# Altium PCB B2C_V1.0-V5.0.PcbDoc
Units mm, origin at the board's own origin, x right, y up, seen from the top; angles counter-clockwise.
Board outline 66.13 x 30.13 mm, 2 copper layers (Top Layer, Bottom Layer); 31 components, 27 nets, 114 pads, 13 vias.
Unrouted connection lines stored in the file: 2.
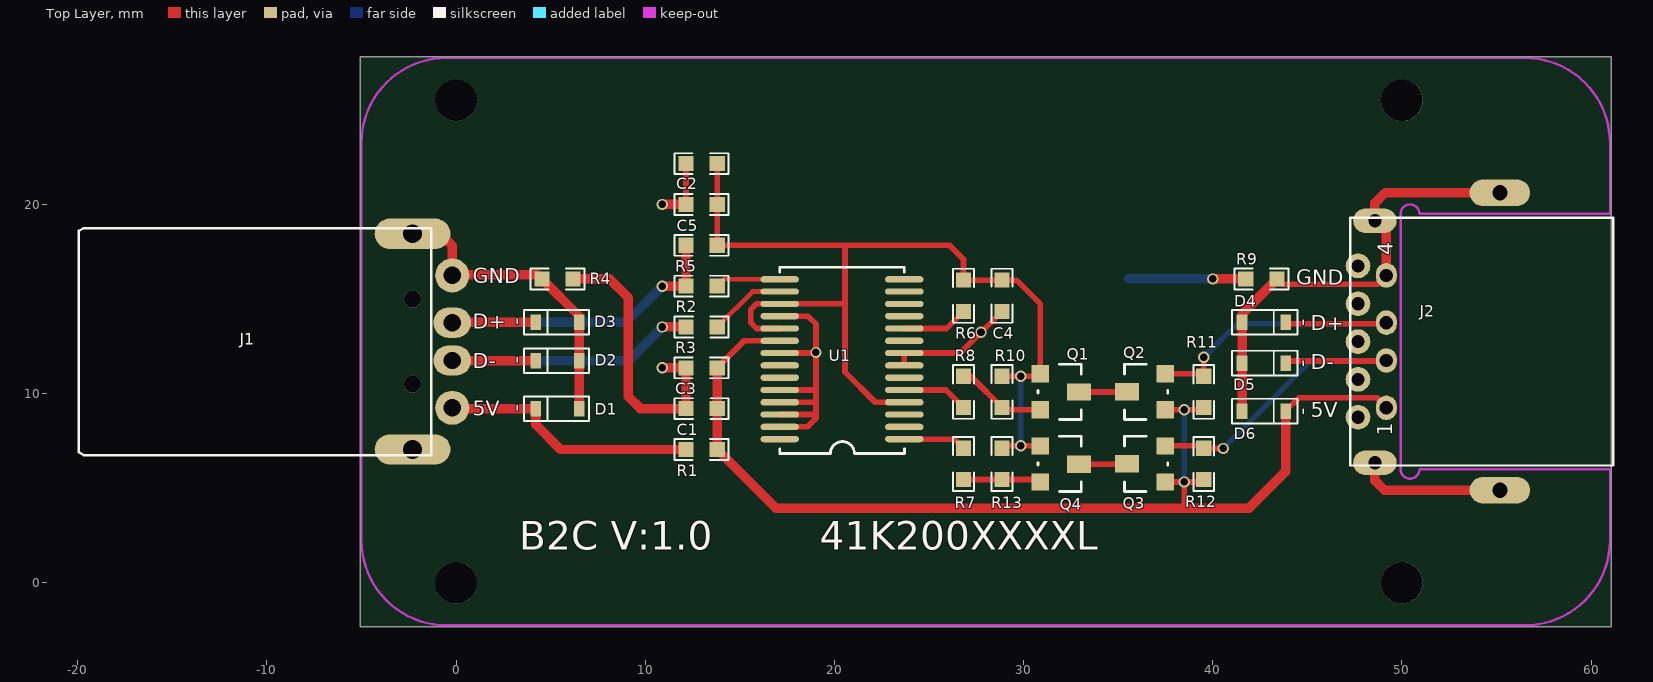
[diagram p0: Top Layer view]
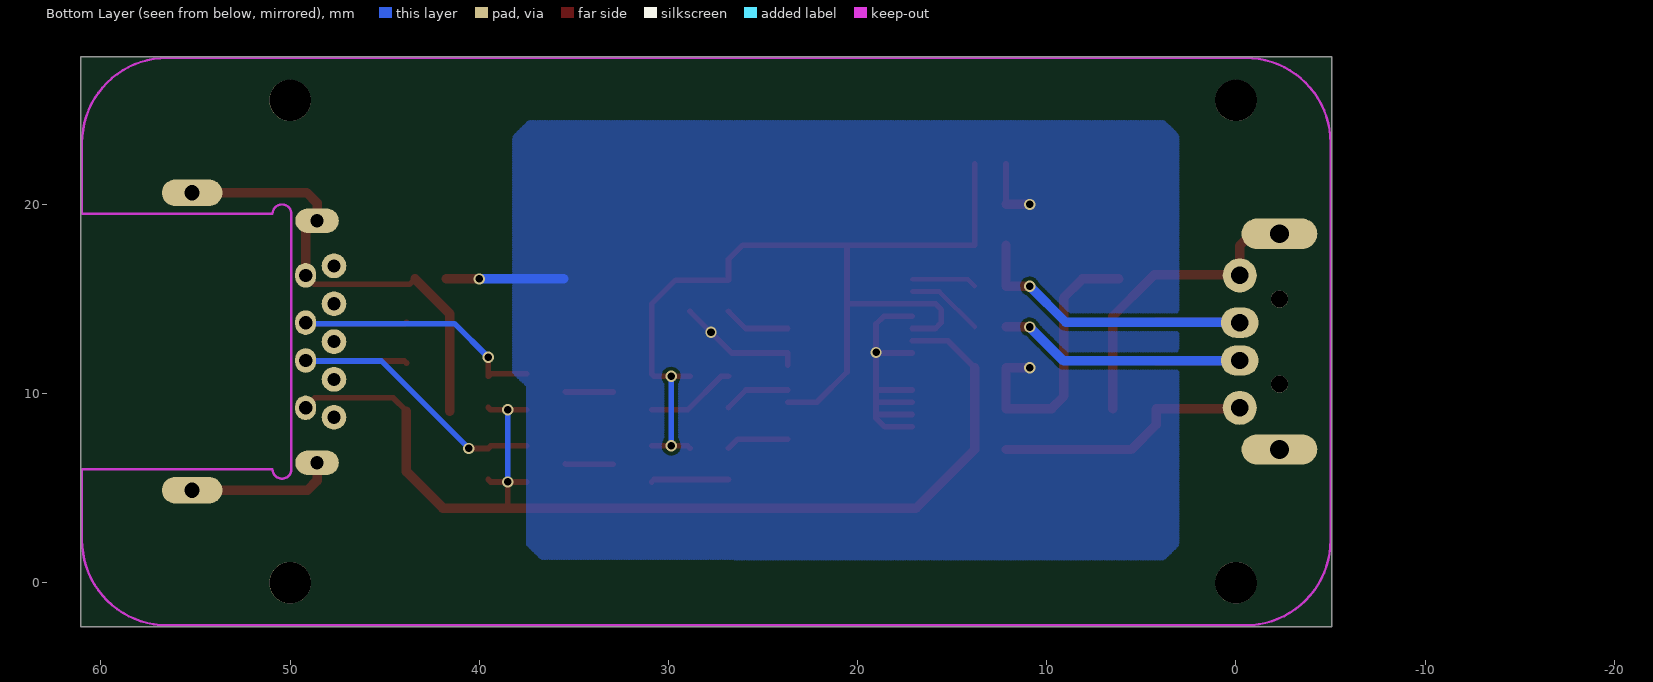
[diagram p1: Bottom Layer view, seen from below]

## Layer stack, top to bottom
Top Layer: signal copper 0.0356
Dielectric: core 0.32, FR-4, Dk 4.8
Bottom Layer: signal copper 0.0356

## Board outline
-5.063,-2.314 61.064,-2.314 61.064,27.814 -5.063,27.814

## Design rules (kind name [scope] priority, off if disabled: settings)
Clearance Clearance_1 [InNetClass('All Nets') vs InNetClass('All Nets')] p1: gap=0.203
Clearance keep [All] p2 off: gap=0.5
ComponentClearance [All] p1 off: gap=0.254 collisioncheckmode=3 verticalgap=0.254 showdistances=FALSE
HoleSize [All] p1: absolutevalues=TRUE maxlimit=3.2 minlimit=0.025 maxpercent=80.000 minpercent=20.000
PolygonConnect GND [InNet('GND_1')] p1: connectstyle=Relief reliefconductorwidth=0.508 reliefentries=4 polygonreliefangle="90 Angle"
PolygonConnect [InNet('NetQ56_2')] p2: connectstyle=Direct reliefconductorwidth=0.254 reliefentries=4 polygonreliefangle="90 Angle"
RoutingLayers [All] p1: top layer_v5=FALSE bottom layer_v5=FALSE
RoutingVias [All] p1: holewidth=0.4 width=0.6 viastyle="Through Hole" minholewidth=0.3 minwidth=0.4 maxholewidth=0.8 maxwidth=1.27
SilkscreenOverComponentPads [All] p1: minsilkscreentomaskgap=0.254
SolderMaskExpansion [All] p1: expansion=0.102
Width [All] p1: maxlimit=10 minlimit=0.203 preferedwidth=0.5
24 further rules are at their usual default settings.

## Components (designator, comment, footprint, x,y, rotation, side; value= is the part's Value field where it differs from the comment)
C1 "10UF" 0603 12.983,9.204 r180 top
C2 "0.1UF" 0603 12.983,22.158 r0 top
C3 "0.1UF" 0603 12.983,11.363 r0 top
C4 "0.1UF" 0603 28.858,15.173 r270 top
C5 "10UF" 0603 12.983,19.999 r0 top
D1 "ZD5.6V" SOD-323-BZT52 5.363,9.204 r90 top
D2 "ZD5.6V" SOD-323-BZT52 5.363,11.744 r90 top
D3 "ZD5.6V" SOD-323-BZT52 5.363,13.776 r90 top
D4 "ZD5.6V" SOD-323-BZT52 42.701,13.776 r270 top
D5 "ZD5.6V" SOD-323-BZT52 42.701,11.617 r270 top
D6 "ZD5.6V" SOD-323-BZT52 42.701,9.077 r270 top
J1 "USB_A" USB_NTD -1.25,12.75 r0 top
J2 "USB_B" USB_A_TYPE_1 49.18,16.25 r90 top locked
Q1 "2N7002K" SOT-23 31.906,10.093 r270 top
Q2 "2N7002K" SOT-23 36.478,10.093 r90 top
Q3 "2N7002K" SOT-23 36.478,6.283 r90 top
Q4 "2N7002K" SOT-23 31.906,6.283 r270 top
R1 "BEAD" 0603 12.983,7.045 r0 top
R2 "22R" 0603 12.983,15.681 r0 top
R3 "22R" 0603 12.983,13.522 r180 top
R4 "BEAD" 0603 5.363,16.062 r0 top
R5 "1.5K" 0603 12.983,17.84 r0 top
R6 "4.7K" 0603 26.826,15.173 r90 top
R7 "BEAD" 0603 26.826,6.283 r270 top
R8 "BEAD" 0603 26.826,10.093 r90 top
R9 "BEAD" 0603 42.574,16.062 r0 top
R10 "4.7K" 0603 28.858,10.093 r270 top
R11 "4.7K" 0603 39.526,10.093 r90 top
R12 "4.7K" 0603 39.526,6.283 r90 top
R13 "4.7K" 0603 28.858,6.283 r270 top
U1 "PL2303HXD-SSOP28" SSOP-28 26.112,18.33 r180 top

## Footprints (in the part's own frame and the unit in brackets; to place one, negate y for a bottom-side part, rotate by r counter-clockwise, add the part's x,y. Pads: shape width x height; smd on the part's side, far side on the other; paste and mask are expansions set on the pad)
0603 [mm]
  rect 0.8x0.8 smd: 1(-0.825,0) 2(0.825,0)
  silkscreen extent -1.42,-0.55 1.43,0.55
SOD-323-BZT52 [mm]
  rect 0.82x0.56 smd: 1(0,1.15) 2(0,-1.15)
  silkscreen extent -0.65,-1.67 0.65,1.78
SOT-23 [mil]
  rect 36x36 smd: 1(-37.5,-40) 2(37.5,-40)
  rect 36x50 smd: 3(0.5,40)
  silkscreen extent -58,-45 58,45
SSOP-28 [mil]
  round 19.68 on Top Overlay: 0(29.23,423.03)
  oval 80x13 smd: 1(95.02,422.74) 2(95.02,397.15) 3(95.02,371.56) 4(95.02,345.96) 5(95.02,320.37) 6(95.02,294.78) 7(95.02,269.19) 8(95.02,243.6) 9(95.02,218.01) 10(95.02,192.42) 11(95.02,166.83) 12(95.02,141.24) 13(95.02,115.65) 14(95.02,90.06) 15(354.39,90.06) 16(354.39,115.65) 17(354.39,141.24) 18(354.39,166.83) 19(354.39,192.42) 20(354.39,218.01) 21(354.39,243.6) 22(354.39,269.19) 23(354.39,294.78) 24(354.39,320.37) 25(354.39,345.96) 26(354.39,371.56) 27(354.39,397.15) 28(354.39,422.74)
  silkscreen extent 95,65 354,453
USB_A_TYPE_1 [mm]
  oval 1.4x3.2 hole 0.8: 0(-11.356,-5.999) 0(4.366,-5.999)
  oval 1.3x2.3 hole 0.7: 0(-9.909,0.605) 0(2.893,0.605)
  oval 1.3x1.1 hole 0.7: 1(-7,0) 2(-4.5,0) 3(-2.5,0) 4(0,0)
  round 1.3 hole 0.7: 5(0.5,1.5) 6(-1.5,1.5) 7(-3.5,1.5) 8(-5.5,1.5) 9(-7.5,1.5)
USB_NTD [mm]
  round 0.9 hole 0.9: 0(-1.05,2.25) 0(-1.05,-2.25)
  oval 4x1.6 hole 1: 0(-1.048,-5.7) 0(-1.048,5.7)
  round 1.8 hole 0.92: 1(1.05,-3.5) 4(1.05,3.5)
  oval 2x1.6 hole 0.92: 2(1.05,-1) 3(1.05,1)
  silkscreen extent -18.7,-6 -0.05,6

## Free pads (board coordinates)
  round 2.2 hole 2.2 unplated: 0(0,0) 0(0,25.5) 0(50,0) 0(50,25.5)

## Via types
v1: diameter 0.6, hole 0.4, Top Layer to Bottom Layer, tented both sides, 13 vias

## Nets (pads, with @x,y where several pads share a name; then routed paths per layer and width w, separated by ;. In a path a pad name is that pad's centre, name@x,y a point inside that pad or via, vN(x,y) a via of type N, cw(c..) or ccw(c..) an arc to the next point about the centre after c; other vN are vias at no path point)
GND: C1.2 C2.1 C3.1 C4.2 C5.1 R4.2 R9.1 U1.7 U1.8 U1.18 U1.21 U1.24 U1.25 U1.26 U1.27 | length 51.6
  Top Layer w0.3: C5.1 C2.1 ; U1.27 18.569,8.243 19.027,8.7 19.027,10.225 ; U1.26 18.969,8.893 ; U1.25 18.944,9.543 ; U1.24 18.994,10.193 19.027,10.225 ; U1.21 v1@19.019,12.143 ; U1.18 18.609,14.093 19.027,13.675 19.027,10.225 ; U1.7 U1.8 ; 25.448,12.143 U1.8 ; C4.2 26.652,12.143 U1.8
  Top Layer w0.5: R4.2 8.115,16.062 9.102,15.075 9.102,9.85 9.748,9.204 C1.2 ; 10.598,9.204 C1.2 ; v1(10.902,11.363) C3.1 C1.2 ; v1(10.902,19.999) C5.1 ; v1(39.999,16.062) R9.1
  Bottom Layer w0.5: 35.539,16.062 v1(39.999,16.062)
  other v1: 19.027,12.175 27.752,13.243
NetC1_2: 
NetD1_1: D1.1 J1.1 R1.1 | length 13.7
  Top Layer w0.5: J1.1@-0.169,9.204 D1.1 4.213,8.364 5.532,7.045 R1.1
NetD1_2: D1.2 D2.2 D3.2 J1.0@-2.298,7.05 J1.0@-2.298,18.45 J1.4 R4.1 | length 16.4
  Top Layer w0.5: J1.0@-2.298,18.45 -0.825,18.45 -0.198,17.823 -0.198,16.275 4.325,16.275 R4.1 6.513,14.087 D3.2 D2.2 D1.2
NetD2_1: D2.1 J1.2 R3.2 | length 17.4
  Top Layer w0.5: J1.2@-0.167,11.744 D2.1 ; v1(10.908,13.522) R3.2
  Bottom Layer w0.5: J1.2@-0.148,11.725 9.111,11.725 v1(10.908,13.522)
NetD3_1: D3.1 J1.3 R2.1 R5.1 | length 19.7
  Top Layer w0.5: J1.3@-0.197,13.776 D3.1 ; v1(10.908,15.681) R2.1 R5.1
  Bottom Layer w0.5: J1.3@-0.198,13.775 9.002,13.775 v1(10.908,15.681)
NetD4_1: D4.1 J2.3 Q2.2 R11.2 | length 18.9
  Top Layer w0.3: Q2.2 39.398,11.046 R11.2 v1(39.526,11.918) ; D4.1 43.927,13.7 J2.3@49.202,13.7
  Bottom Layer w0.3: v1(39.526,11.918) 41.308,13.7 J2.3@49.202,13.7
NetD4_2: D4.2 D5.2 D6.2 J2.0 J2.4 R9.2 | length 32.5
  Top Layer w0.3: R9.2 43.686,15.775 48.727,15.775 J2.4@49.177,16.225
  Top Layer w0.5: D6.2 D5.2 D4.2 41.551,14.214 R9.2 ; J2.0@48.575,6.341 48.575,5.4 49.081,4.894 J2.0@55.179,4.894 ; J2.4 49.18,18.538 48.575,19.143 48.575,20.075 49.116,20.616 J2.0@55.179,20.616
NetD5_1: D5.1 J2.2 Q3.2 R12.2 | length 19
  Top Layer w0.3: Q3.2 39.398,7.236 R12.2 ; R12.2@39.534,7.1 v1(40.552,7.1) ; D5.1 43.959,11.725 J2.2@49.177,11.725
  Bottom Layer w0.3: v1(40.552,7.1) 45.177,11.725 J2.2@49.177,11.725
NetJ2_1: 
NetJ2_2: 
NetJ2_3: 
NetJ2_4: 
NetQ1_2: Q1.2 R8.2 R10.2 | length 4.8
  Top Layer w0.3: R8.2 27.208,10.918 28.985,9.141 Q1.2
NetQ1_3: Q1.3 Q2.3 | length 2.6
  Top Layer w0.3: Q1.3 35.436,10.081 Q2.3
NetQ3_3: Q3.3 Q4.3 | length 2.6
  Top Layer w0.3: Q4.3 35.436,6.271 Q3.3
NetQ4_2: Q4.2 R7.2 R13.2 | length 4.1
  Top Layer w0.3: R7.2 R13.2 30.762,5.458 Q4.2
NetR1_1: 
NetR2_1: 
NetR2_2: R2.2 U1.15 | length 3.5
  Top Layer w0.254: R2.2 14.169,16.043 U1.15
NetR3_1: R3.1 U1.16 | length 4.1
  Top Layer w0.254: R3.1 15.678,15.393 U1.16
NetR3_2: 
NetR6_1: R6.1 U1.10 | length 3.5
  Top Layer w0.3: U1.10 25.92,13.443 R6.1
NetR7_1: R7.1 U1.1 | length 3.3
  Top Layer w0.3: U1.1 26.341,7.593 R7.1
NetR8_1: R8.1 U1.5 | length 3.5
  Top Layer w0.3: U1.5 25.901,10.193 R8.1
USB5V: C1.1 C3.2 D6.1 J2.1 Q2.1 Q3.1 R1.2 R11.1 R12.1 U1.20 | length 58.7
  Top Layer w0.3: C3.2 15.237,12.793 U1.20 ; Q3.1 v1(38.502,5.331) ; Q2.1 v1(38.502,9.141) 39.398,9.141 R11.1 ; 38.502,3.975 v1(38.502,5.331) ; R12.1 39.398,5.331 v1(38.502,5.331) ; D6.1 44.549,9.775 48.702,9.775 J2.1@49.202,9.275
  Top Layer w0.5: C3.2 C1.1 R1.2 16.903,3.95 41.927,3.95 43.851,5.874 D6.1
  Bottom Layer w0.3: v1(38.502,5.331) v1(38.502,9.141)
VO_33: C2.2 C4.1 C5.2 Q1.1 Q4.1 R5.2 R6.2 R10.1 R13.1 U1.4 U1.17 U1.19 | length 53.5
  Top Layer w0.3: C2.2 C5.2 R5.2 20.562,17.84 ; U1.19 15.884,13.443 15.577,13.75 15.577,14.45 15.869,14.743 U1.17 20.504,14.743 ; 21.652,10.05 22.159,9.543 ; U1.4 22.159,9.543 ; R13.1 28.985,7.236 v1(29.852,7.236) Q4.1 ; R10.1 v1(29.858,10.918) 30.762,10.918 Q1.1 30.89,14.737 29.629,15.998 C4.1 R6.2 26.826,17.101 26.087,17.84 20.562,17.84 ; 20.562,17.84 20.562,11.14 22.159,9.543
  Bottom Layer w0.3: v1@29.858,7.242 v1(29.858,10.918)
pads on no net: J1.0@-2.3,10.5 J1.0@-2.3,15 J2.5 J2.6 J2.7 J2.8 J2.9 U1.0 U1.2 U1.3 U1.6 U1.9 U1.11 U1.12 U1.13 U1.14 U1.22 U1.23 U1.28

## Polygon pours and split planes (outlines as drawn)
GND on Bottom Layer "Bottom Layer-GND" (hatched 90Degree grid 0.127 track 0.203, remove dead copper, pour order 1000): 3.827,1.275 3.077,2.025 3.077,12.825 3.077,23.625 3.802,24.35 37.377,24.35 38.177,23.55 38.177,11.125 37.427,10.375 37.427,2.025 36.702,1.3

## Keep-outs
Keep-Out Layer:
  lines w0.127: -5,2.25 ccw(c-0.5,2.25) -0.5,-2.25 56.5,-2.25 ccw(c56.5,2.25) 61,2.25 61,6 50.93,6 cw(c50.43,6) 49.93,6 49.93,19.5 cw(c50.43,19.5) 50.93,19.5 61,19.5 61,23.25 ccw(c56.5,23.25) 56.5,27.75 -0.5,27.75 ccw(c-0.5,23.25) -5,23.25 -5,2.25

## Other copper
Top Layer:
  text "TopLayer" at 34.457,-47.083 h2.29
Bottom Layer:
  text "BottomLayer" at 34.774,-47.158 h2.29

## Silkscreen, mask and mechanical layers (free items; w line width, h text height)
Top Overlay:
  lines w0.127: -1.3,6.75 -1.3,18.75 ; 47.28,6.2 47.28,19.3 61.18,19.3 61.18,6.2 47.28,6.2
  text "4" at 49.527,17.325 h0.8 r90
  text "GND" at 0.877,15.825 h0.8
  text "GND" at 44.427,15.75 h0.8
  text "D+" at 0.877,13.425 h0.8
  text "D+" at 45.177,13.35 h0.8
  text "D-" at 0.877,11.35 h0.8
  text "D-" at 45.177,11.275 h0.8
  text "5V" at 0.877,8.825 h0.8
  text "5V" at 45.177,8.75 h0.8
  text "1" at 49.502,7.775 h0.8 r90
  text "B2C V:1.0" at 3.352,1.75 h1.5
  text "41K200XXXXL" at 19.227,1.75 h1.5
  text "TopOverlay" at 33.949,-47.083 h2.29
  text "GTO" at 77.307,-47.429 h2.29
Bottom Overlay:
  text "BottomOverlay" at 34.774,-47.158 h2.29
  text "GBO" at 78.132,-47.504 h2.29
Top Paste:
  text "TopPaste" at 33.949,-47.083 h2.29
  text "GTP" at 77.307,-47.429 h2.29
Bottom Paste:
  text "BottomPaste" at 34.774,-47.158 h2.29
  text "GBP" at 78.132,-47.504 h2.29
Top Solder:
  text "TopSolder" at 33.949,-47.083 h2.29
  text "GTS" at 77.307,-47.429 h2.29
Bottom Solder:
  text "BottomSolder" at 34.774,-47.158 h2.29
  text "GBS" at 78.132,-47.504 h2.29
Drill Guide:
  text "DrillGuide" at 34.774,-47.158 h2.29
  text "DRL" at 78.132,-47.504 h2.29
Mechanical 1:
  drawing of 189 lines, arcs and shapes, not listed
  text "TITLE:" at 0.036,-27.089 h1.14
  text "ENGINEER:" at -22.507,-27.406 h1.14
  text "VIVI" at -12.775,-27.539 h0.6
  text "DYNAPACK" at 55.78,-28.708 h3.81
  text "PRIOR TO DATE:" at -22.554,-30.003 h1.14
  text "NTD" at 18.794,-31.724 h3.81
  text "ENGINEER:" at -22.507,-37.058 h1.14
  text "PART NO:" at 0.353,-39.154 h1.14
  text "REV:" at 44.486,-39.154 h1.14
  text "DATE:" at 56.233,-39.154 h1.14
  text "PRIOR TO DATE:" at -22.554,-39.604 h1.14
  text "1.0" at 48.931,-41.059 h2.29
  text "03/14/2014" at 61.948,-41.059 h2.29
  text "41K4DM200XXXXL" at 11.072,-41.313 h2.29
  text "FILE NAME:" at -22.507,-46.202 h1.14
  text "LAYER:" at 24.229,-46.202 h1.14
  text "GERBER:" at 70.457,-46.202 h1.14
  text "B2C" at -6.962,-47.925 h2.29
Mechanical 2:
  circle w0.127: c50,0 r2.25
  circle w0.127: c0,0 r2.25
  circle w0.127: c0,25.5 r2.25
  circle w0.127: c50,25.5 r2.25
  lines w0.127: -5,5.25 1.1,5.25 1.1,1.963 ; -5,20.25 1.1,20.25 1.1,23.537 ; 1.963,1.1 48.037,1.1 ; 1.963,24.4 48.037,24.4 ; 48.9,1.963 48.9,4.25 61,4.25 ; 48.9,23.537 48.9,21.25 61,21.25
Drill Drawing:
  text ".Legend" at -3.423,30.925 h2
  text "DrillDrawing" at 34.774,-47.158 h2.29
  text "DRR" at 78.132,-47.504 h2.29

## Text inside footprints (layer, text, board x,y; h text height)
D1: Top Overlay "-" at 2.95,9.433 h0.8 r270
D2: Top Overlay "-" at 2.95,11.973 h0.8 r270
D3: Top Overlay "-" at 2.95,14.005 h0.8 r270
D4: Top Overlay "-" at 45.113,13.548 h0.8 r90
D5: Top Overlay "-" at 45.113,11.389 h0.8 r90
D6: Top Overlay "-" at 45.113,8.849 h0.8 r90
J1: Drill Drawing "1X2.5mm" at -12.923,18.175 h0.8; Drill Drawing "1X2.5mm" at -12.898,6.775 h0.8
J2: Drill Drawing "0.8X2.6mm" at 60.488,19.473 h0.8 r90; Drill Drawing "0.8X2.6mm" at 60.488,3.751 h0.8 r90; Drill Drawing "0.7X1.8mm" at 53.173,16.628 h0.8 r90; Drill Drawing "0.7X1.8mm" at 53.173,3.827 h0.8 r90